# Altium PCB PCB1.PcbDoc
Units mm, origin at the board's own origin, x right, y up, seen from the top; angles counter-clockwise.
Board outline 99.69 x 92.71 mm, 4 copper layers (Component Side, Ground Plane, Power Plane, Solder Side), stack 0.844 mm thick; 51 components, 100 nets, 295 pads, 20 vias.
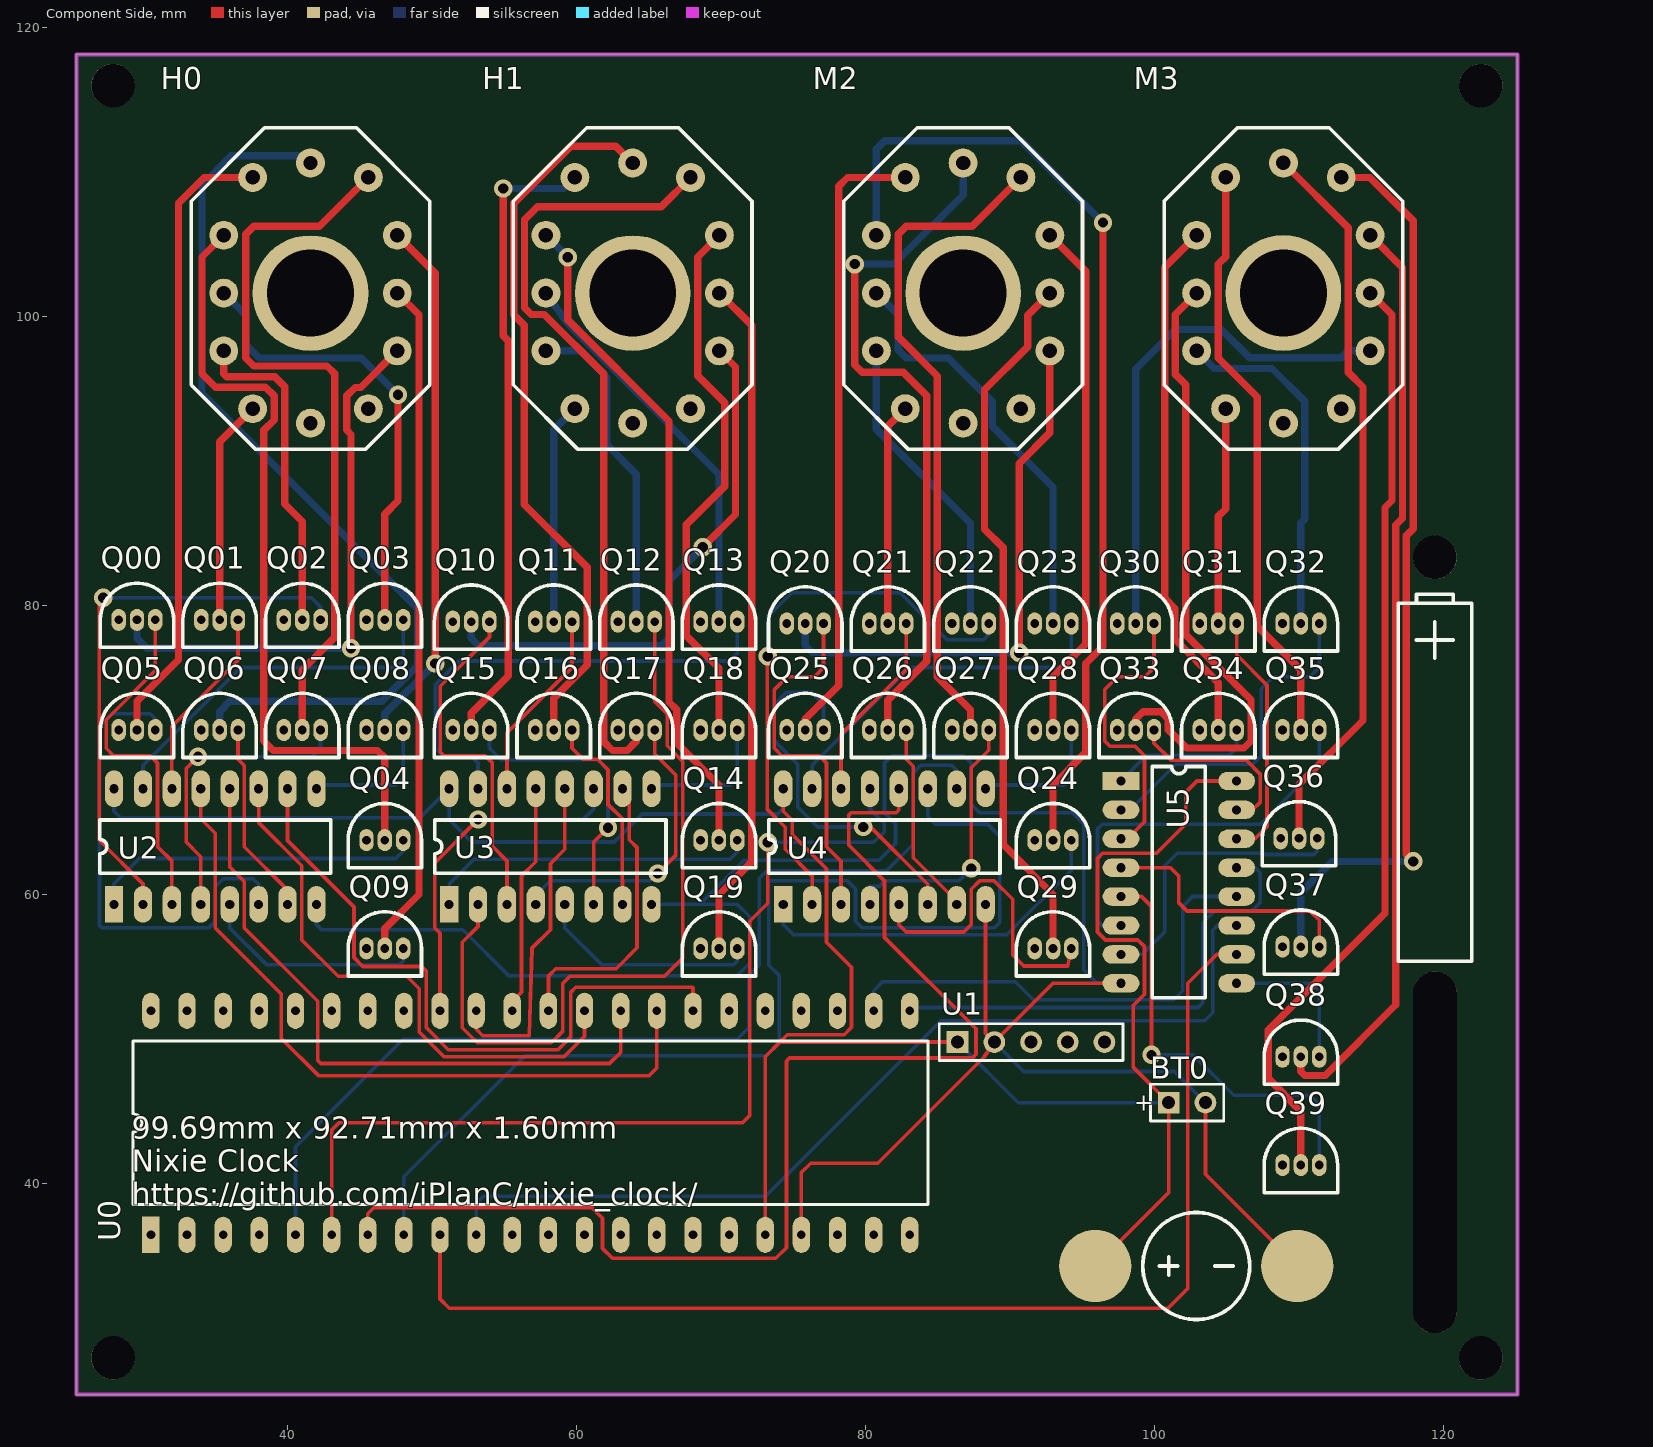
[diagram p0: Component Side view]
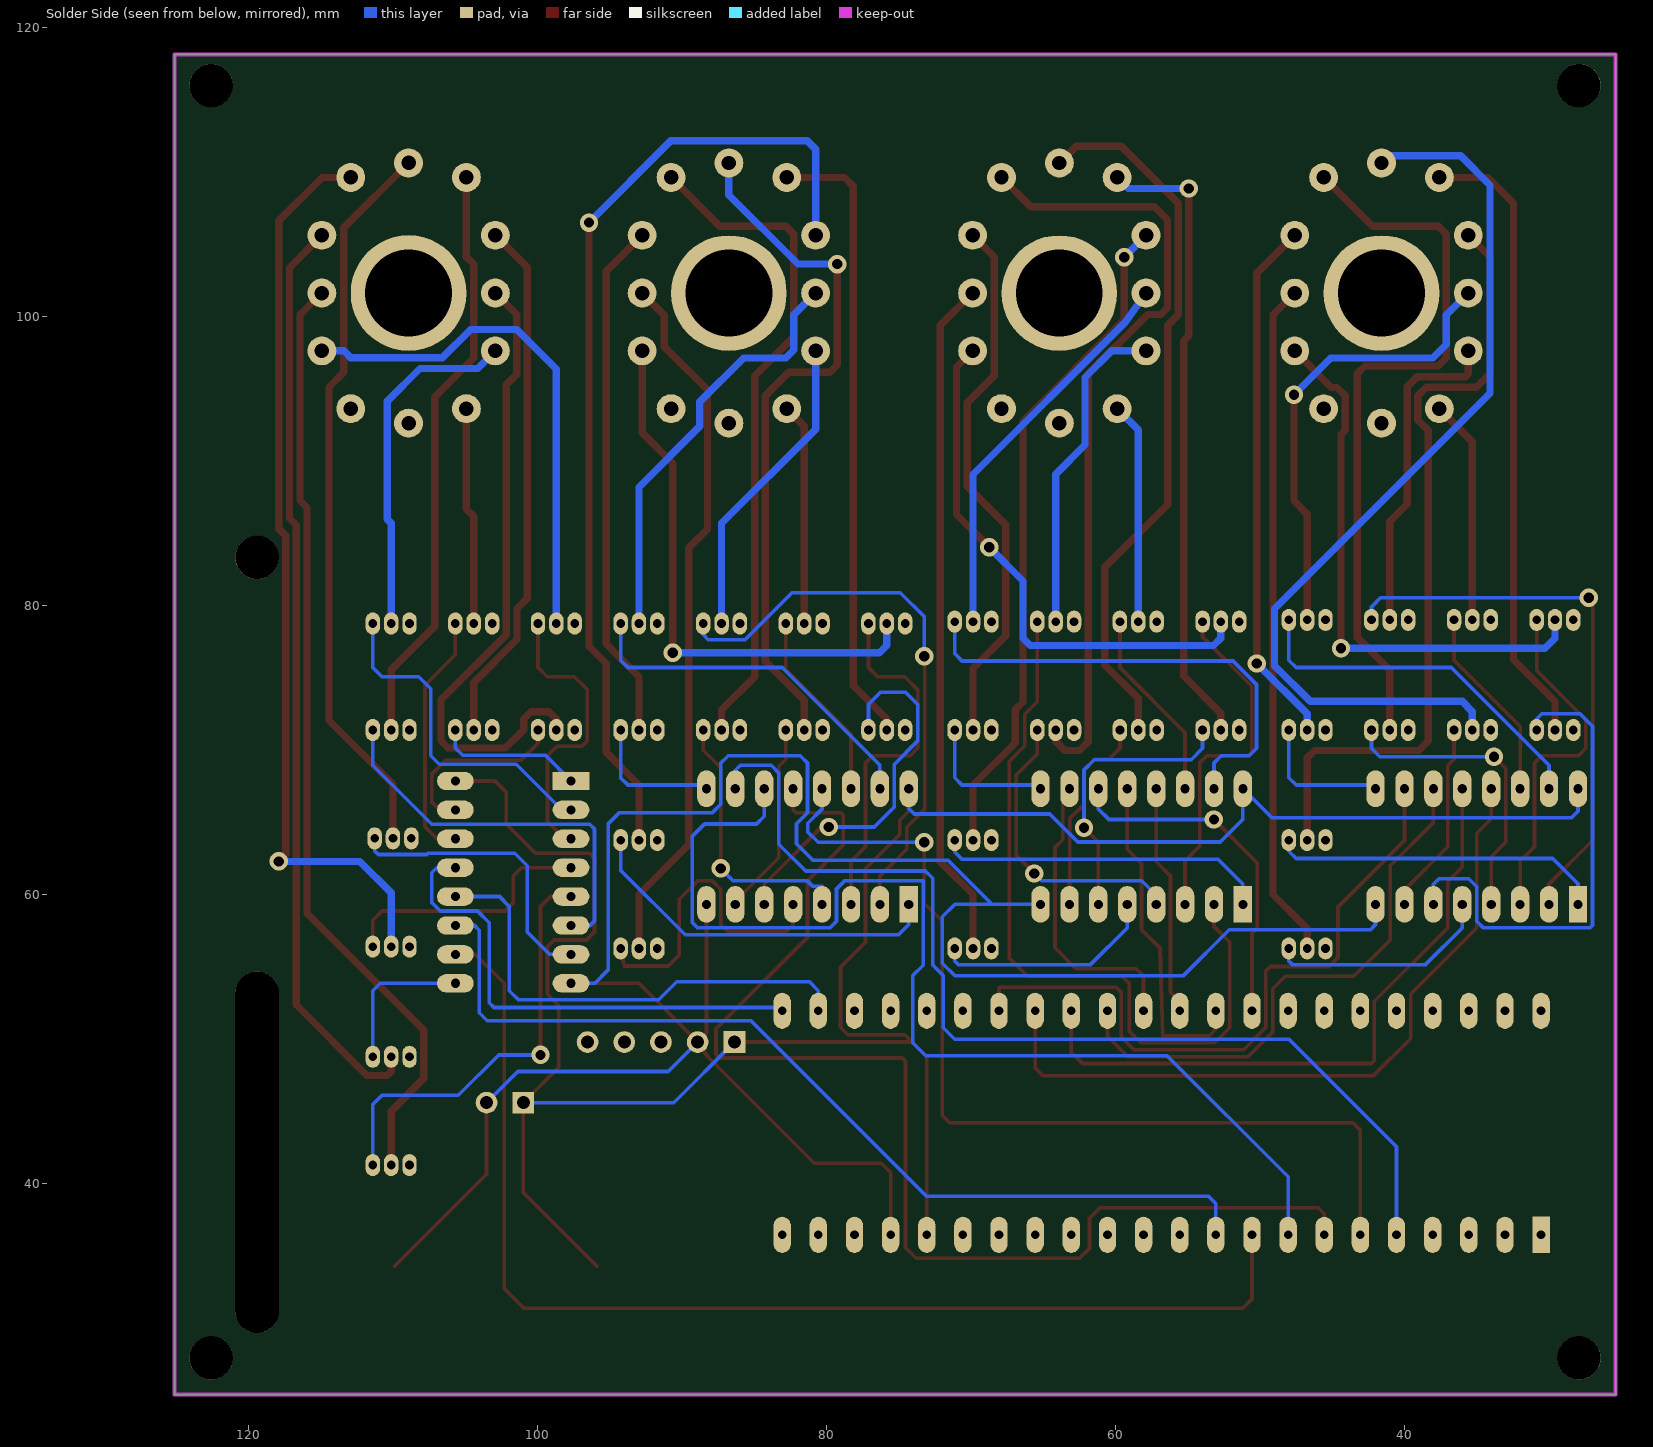
[diagram p1: Solder Side view, seen from below]
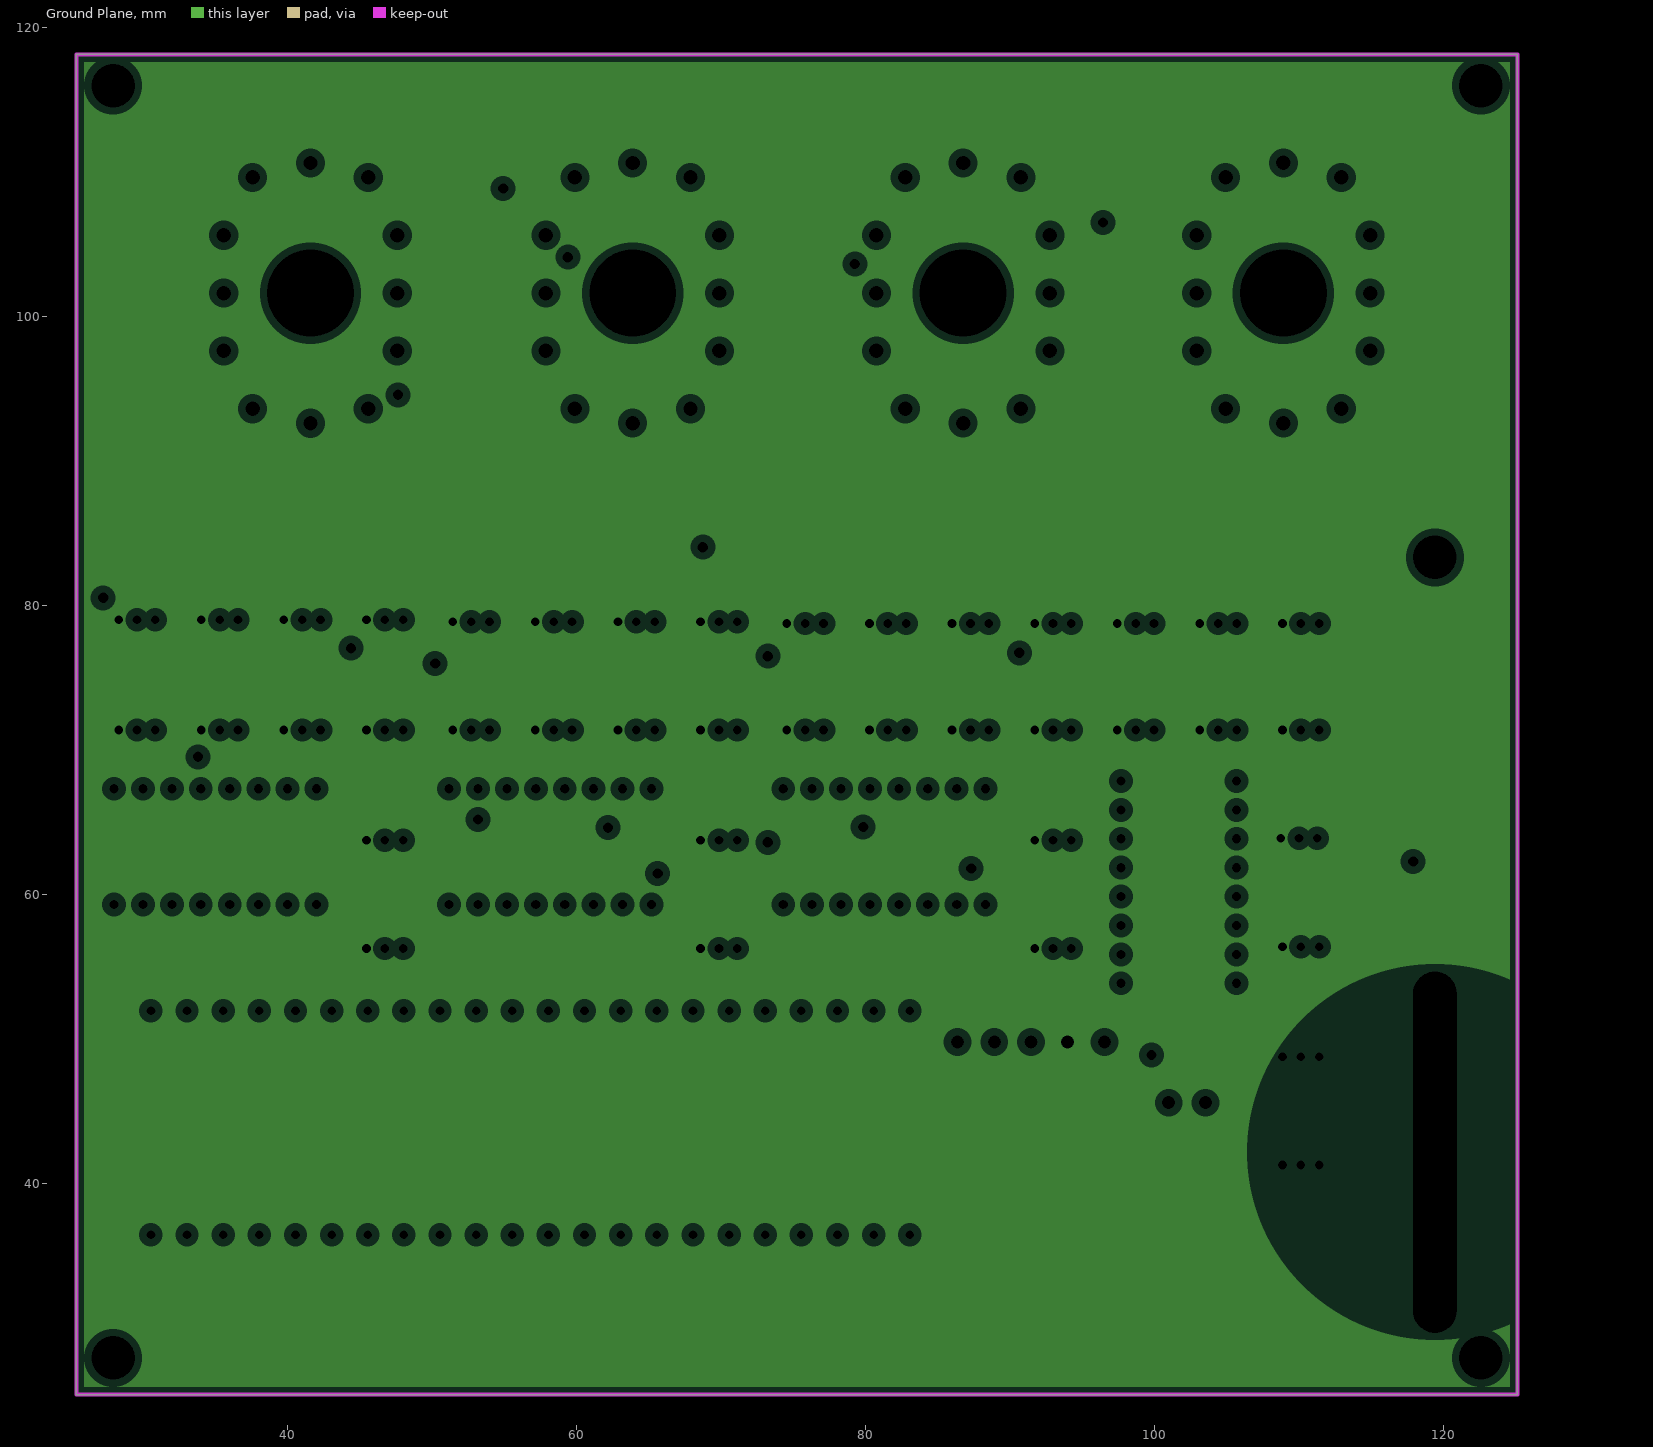
[diagram p2: Ground Plane, clearances drawn from the general rule]
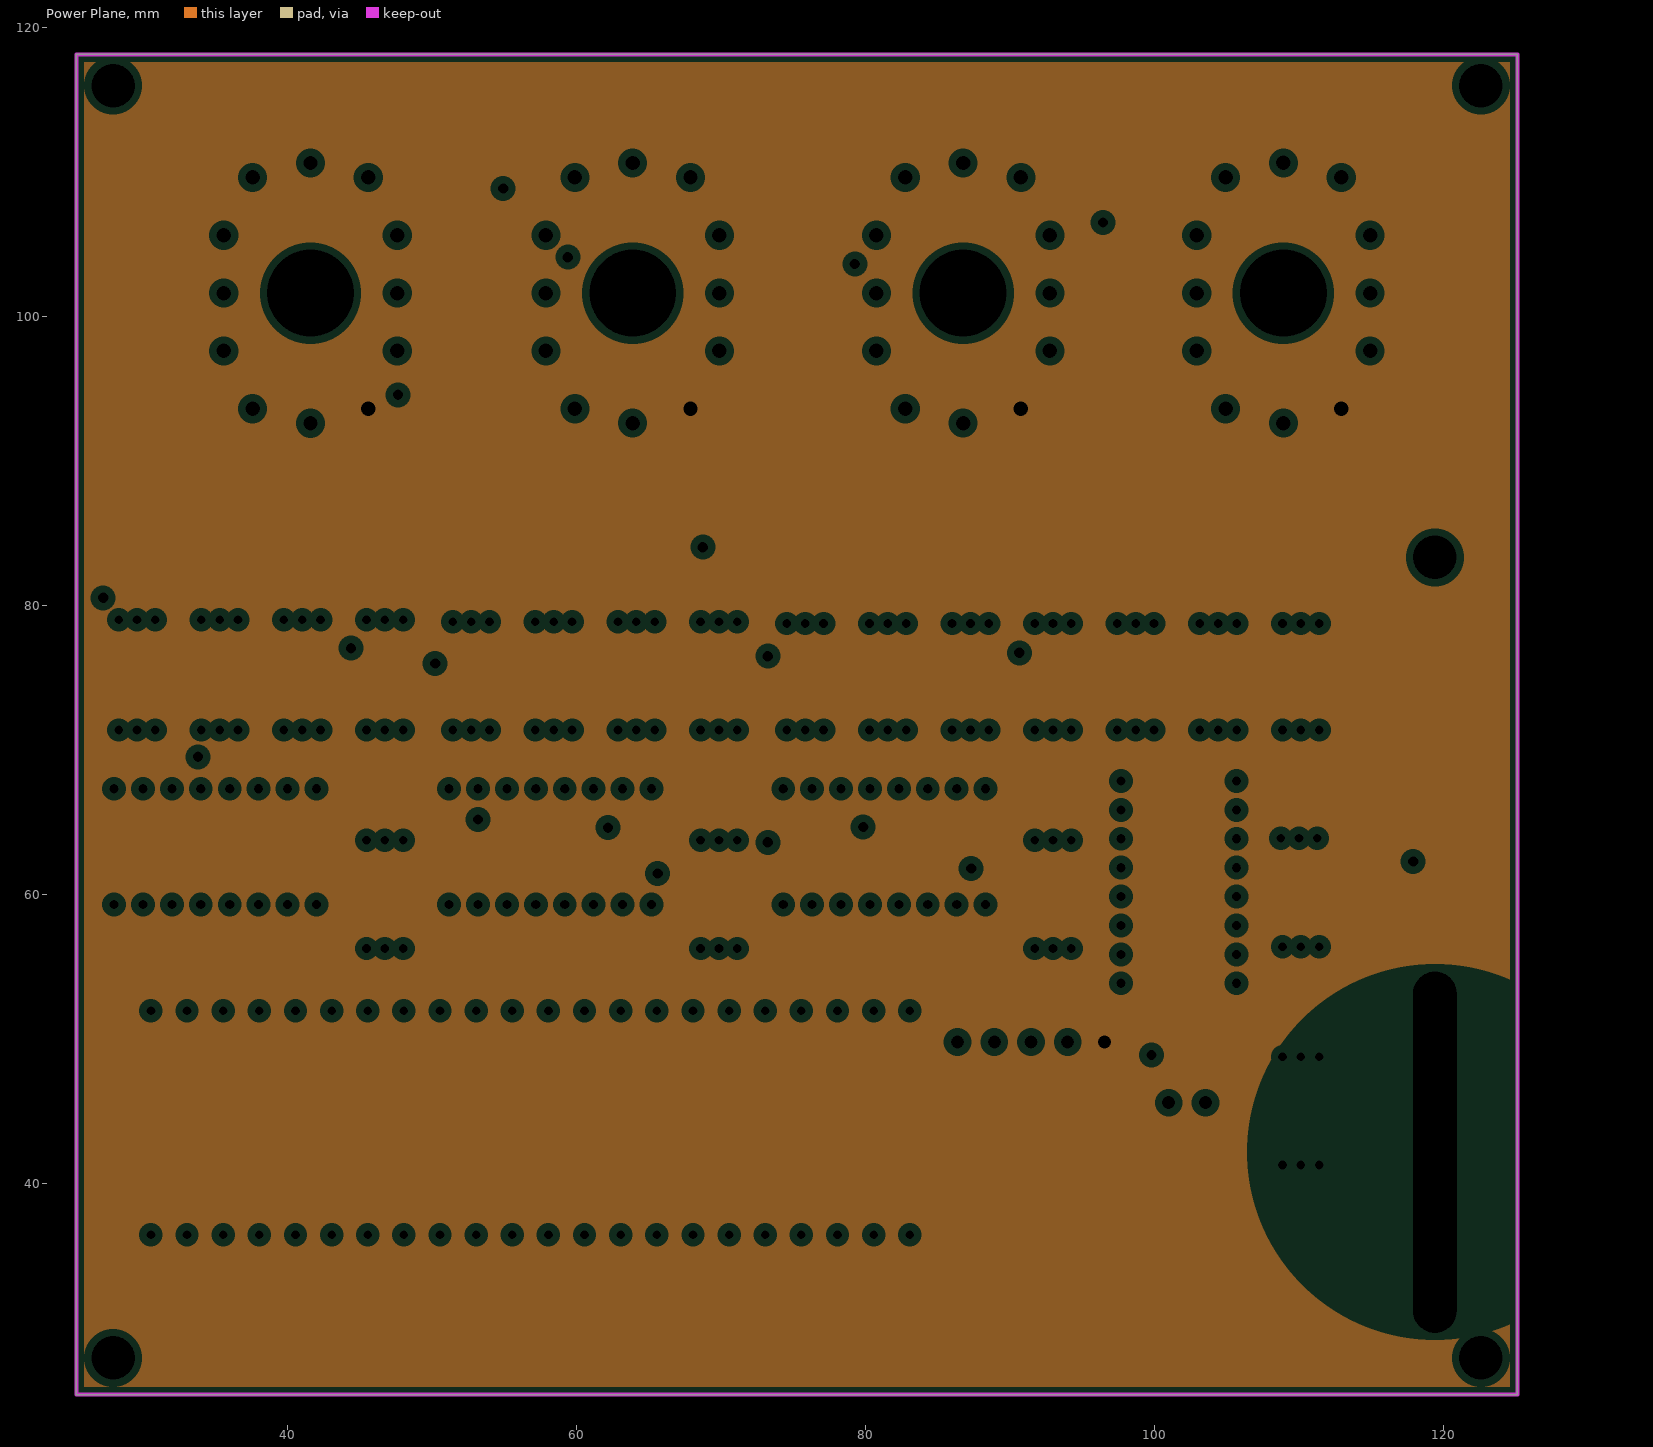
[diagram p3: Power Plane, clearances drawn from the general rule]

## Layer stack, top to bottom
Top Solder: solder mask 0.0102, Solder Resist, Dk 3.5
Component Side: signal copper 0.0356
Dielectric 1: core 0.32, FR-4, Dk 4.8
Ground Plane: plane copper 0.036, net 170VGND
Dielectric 3: prepreg 0.127, Dk 4.2
Power Plane: plane copper 0.036, net 170V
Dielectric 4: core 0.254, Dk 4.2
Solder Side: signal copper 0.0356
Bottom Solder: solder mask 0.0102, Solder Resist, Dk 3.5

## Board outline
25.4,25.4 125.095,25.4 125.095,118.11 25.4,118.11

## Design rules (kind name [scope] priority, off if disabled: settings)
Clearance [All] p1: gap=0.229
Height [All] p1: minheight=0 maxheight=152.4 prefheight=12.7
PlaneClearance [All] p1: clearance=0.508
PlaneConnect [All] p1: planeconnectstyle=Relief reliefexpansion=0.508 reliefentries=4 reliefconductorwidth=0.254 reliefairgap=0.254
PolygonConnect [All] p1: connectstyle=Relief reliefconductorwidth=0.254 reliefentries=4 polygonreliefangle="90 Angle" airgapwidth=0.254
RoutingVias [All] p1: holewidth=0.711 width=1.27 viastyle="Through Hole" minholewidth=0.711 minwidth=1.27 maxholewidth=0.711 maxwidth=1.27
SolderMaskExpansion [All] p1: expansion=0.102
Width "5v Width" [InNetClass('5v circuit')] p1: maxlimit=0.254 minlimit=0.254 preferedwidth=0.254
Width "170v Width" [InNetClass('170v circuit')] p2: maxlimit=0.508 minlimit=0.508 preferedwidth=0.508
27 further rules are at their usual default settings.

## Classes and differential pairs
net class "170v circuit": 170V 170VGND NH00 NH01 NH02 NH03 NH04 NH05 NH06 NH07 NH08 NH09 NH10 NH11 NH12 NH13 NH14 NH15 NH16 NH17 NH18 NH19 NM20 NM21 NM22 NM23 NM24 NM25 NM26 NM27 NM28 NM29 NM30 NM31 NM32 NM33 NM34 NM35 NM36 NM37 NM38 NM39
net class "5v circuit": 5V GND N00 N01 N02 N03 N04 N05 N06 N07 N08 N09 N10 N11 N12 N13 N14 N15 N16 N17 N18 N19 N20 N21 N22 N23 N24 N25 N26 N27 N28 N29 N30 N31 N32 N33 N34 N35 N36 N37 N38 N39 PA0 PA1 PA2 PA3 PA4 PA5 PA6 PA7 PA8 PA9 PA10 PA11 PA12 PA13 PA14 PA15
component class Sheet1: H0 H1 M2 M3 U0 U1 U2 U3 U4 U5

## Components (designator, comment, footprint, x,y, rotation, side; value= is the part's Value field where it differs from the comment)
BT0 "Battery" BAT-2 102.235,45.593 r0 top
H0 "IN-12B" "IN-12B BASE" 41.593,101.599 r0 top
H1 "IN-12B" "IN-12B BASE" 63.881,101.6 r0 top
M2 "IN-12B" "IN-12B BASE" 86.741,101.6 r0 top
M3 "IN-12B" "IN-12B BASE" 108.902,101.601 r0 top
Q00 "2N3904" TO-92 29.591,78.994 r0 top
Q01 "2N3904" TO-92 35.306,78.994 r0 top
Q02 "2N3904" TO-92 41.021,78.994 r0 top
Q03 "2N3904" TO-92 46.736,78.994 r0 top
Q04 "2N3904" TO-92 46.736,63.754 r0 top
Q05 "2N3904" TO-92 29.591,71.374 r0 top
Q06 "2N3904" TO-92 35.306,71.374 r0 top
Q07 "2N3904" TO-92 41.021,71.374 r0 top
Q08 "2N3904" TO-92 46.736,71.374 r0 top
Q09 "2N3904" TO-92 46.736,56.261 r0 top
Q10 "2N3904" TO-92 52.705,78.867 r0 top
Q11 "2N3904" TO-92 58.42,78.867 r0 top
Q12 "2N3904" TO-92 64.135,78.867 r0 top
Q13 "2N3904" TO-92 69.85,78.867 r0 top
Q14 "2N3904" TO-92 69.85,63.754 r0 top
Q15 "2N3904" TO-92 52.705,71.374 r0 top
Q16 "2N3904" TO-92 58.42,71.374 r0 top
Q17 "2N3904" TO-92 64.135,71.374 r0 top
Q18 "2N3904" TO-92 69.85,71.374 r0 top
Q19 "2N3904" TO-92 69.85,56.261 r0 top
Q20 "2N3904" TO-92 75.819,78.74 r0 top
Q21 "2N3904" TO-92 81.534,78.74 r0 top
Q22 "2N3904" TO-92 87.249,78.74 r0 top
Q23 "2N3904" TO-92 92.964,78.74 r0 top
Q24 "2N3904" TO-92 92.964,63.754 r0 top
Q25 "2N3904" TO-92 75.819,71.374 r0 top
Q26 "2N3904" TO-92 81.534,71.374 r0 top
Q27 "2N3904" TO-92 87.249,71.374 r0 top
Q28 "2N3904" TO-92 92.964,71.374 r0 top
Q29 "2N3904" TO-92 92.964,56.261 r0 top
Q30 "2N3904" TO-92 98.679,78.74 r0 top
Q31 "2N3904" TO-92 104.394,78.74 r0 top
Q32 "2N3904" TO-92 110.109,78.74 r0 top
Q33 "2N3904" TO-92 98.679,71.374 r0 top
Q34 "2N3904" TO-92 104.394,71.374 r0 top
Q35 "2N3904" TO-92 110.109,71.374 r0 top
Q36 "2N3904" TO-92 109.982,63.881 r0 top
Q37 "2N3904" TO-92 110.109,56.388 r0 top
Q38 "2N3904" TO-92 110.109,48.768 r0 top
Q39 "2N3904" TO-92 110.109,41.275 r0 top
U0 "STM32" STM32 30.553,36.449 r90 top
U1 "boost" HDR1X5 86.36,49.784 r0 top
U2 "CD4028" CD4028 28.004,59.309 r90 top
U3 "CD4028" CD4028 51.182,59.31 r90 top
U4 "CD4028" CD4028 74.296,59.309 r90 top
U5 "CD4028" CD4028 97.663,67.849 r0 top

## Footprints (in the part's own frame and the unit in brackets; to place one, negate y for a bottom-side part, rotate by r counter-clockwise, add the part's x,y. Pads: shape width x height; smd on the part's side, far side on the other; paste and mask are expansions set on the pad)
BAT-2 [mm] "Battery; 2 Leads"
  rect 1.5x1.5 hole 0.9: 1(-1.27,0)
  round 1.5 hole 0.9: 2(1.27,0)
  silkscreen extent -2.54,-1.27 2.54,1.27
CD4028 [mm]
  rect 2.54x1.27 hole 0.635: 1(0,0)
  oval 2.54x1.27 hole 0.635: 2(0,-2) 3(0,-4) 4(0,-6) 5(0,-8) 6(0,-10) 7(0,-12) 8(0,-14) 9(8,-14) 10(8,-12) 11(8,-10) 12(8,-8) 13(8,-6) 14(8,-4) 15(8,-2) 16(8,0)
  silkscreen extent 2.16,-15 5.84,1
HDR1X5 [mm] "Connector; Header; 5 Position"
  rect 1.5x1.5 hole 0.9: 1(0,0)
  round 1.5 hole 0.9: 2(2.54,0) 3(5.08,0) 4(7.62,0) 5(10.16,0)
  silkscreen extent -1.27,-1.27 11.43,1.27
"IN-12B BASE" [mm]
  round 8 hole 6: 0(0,0)
  round 2 hole 1: 1(-4,-8) 2(-6,-4) 3(-6,0) 4(-6,4) 5(-4,8) 6(0,9) 7(4,8) 8(6,4) 9(6,0) 10(6,-4) 11(4,-8) 12(0,-9)
  silkscreen extent -8.25,-10.8 8.26,11.43, body extent -10.5,-15.13 10.5,15.88, height 29
STM32 [mm]
  rect 2.5x1.2 hole 0.6: 1(0,0)
  oval 2.5x1.2 hole 0.6: 2(0,-2.5) 3(0,-5) 4(0,-7.5) 5(0,-10) 6(0,-12.5) 7(0,-15) 8(0,-17.5) 9(0,-20) 10(0,-22.5) 11(0,-25) 12(0,-27.5) 13(0,-30) 14(0,-32.5) 15(0,-35) 16(0,-37.5) 17(0,-40) 18(0,-42.5) 19(0,-45) 20(0,-47.5) 21(0,-50) 22(0,-52.5) 23(15.5,-52.5) 24(15.5,-50) 25(15.5,-47.5) 26(15.5,-45) 27(15.5,-42.5) 28(15.5,-40) 29(15.5,-37.5) 30(15.5,-35) 31(15.5,-32.5) 32(15.5,-30) 33(15.5,-27.5) 34(15.5,-25) 35(15.5,-22.5) 36(15.5,-20) 37(15.5,-17.5) 38(15.5,-15) 39(15.5,-12.5) 40(15.5,-10) 41(15.5,-7.5) 42(15.5,-5) 43(15.5,-2.5) 44(15.5,0)
  silkscreen extent 2.08,-53.75 13.42,1.25
TO-92 [mm] "NPN"
  oval 1x1.524 hole 0.6: 1(-1.27,0) 2(1.27,0) 3(0,0)
  silkscreen extent -2.54,-1.91 2.54,2.54

## Part data
BT0: "Multicell Battery"
Q00 Q01 Q02 Q03 Q04 Q05 Q06 Q07 Q08 Q09 Q10 Q11 Q12 Q13 Q14 Q15 Q16 Q17 Q18 Q19 Q20 Q21 Q22 Q23 Q24 Q25 Q26 Q27 Q28 Q29 Q30 Q31 Q32 Q33 Q34 Q35 Q36 Q37 Q38 Q39: "NPN General Purpose Amplifier"

## Free pads (board coordinates)
  round 3 hole 3: 0(27.94,115.951) 1(122.555,115.951) 2(27.94,27.94) 3(122.555,27.94) 4(119.38,83.312)
  oval 3x25 hole 3 slot 25 at 90 deg: 5(119.38,42.164)
  round 5 smd: 6(95.885,34.29) 7(109.855,34.29)

## Via types
v1: diameter 1.27, hole 0.711, Component Side to Solder Side, 20 vias

## Nets (pads, with @x,y where several pads share a name; then routed paths per layer and width w, separated by ;. In a path a pad name is that pad's centre, name@x,y a point inside that pad or via, vN(x,y) a via of type N, cw(c..) or ccw(c..) an arc to the next point about the centre after c; other vN are vias at no path point)
5V: BT0.1 pad.6 U0.18 U1.1 U2.16 U3.16 U4.16 U5.16 | length 167.6
  Component Side w0.254: U0.18 73.053,48.768 74.069,49.784 ; U4.16 74.296,65.747 74.918,65.126 74.918,64.147 77.292,61.773 77.292,56.693 79.019,54.966 79.019,50.8 78.511,50.292 74.577,50.292 74.069,49.784 ; U1.1 74.069,49.784 ; pad.6 100.965,39.37 BT0.1 98.501,48.057 98.501,52.299 99.289,53.086 99.289,56.388 98.831,56.845 96.596,56.845 96.037,57.404 96.037,62.484 96.393,62.84 100.127,62.84 102.133,64.846 102.133,67.056 102.926,67.849 U5.16
  Solder Side w0.254: U2.16 28.004,65.747 28.448,65.303 49.175,65.303 U3.16 51.182,65.201 52.756,63.627 62.614,63.627 64.544,65.557 73.914,65.557 74.296,65.939 U4.16 ; U1.1 90.551,45.593 BT0.1
170V: H0.11 H1.11 M2.11 M3.11 U1.5
170VGND: Q00.1 Q01.1 Q02.1 Q03.1 Q04.1 Q05.1 Q06.1 Q07.1 Q08.1 Q09.1 Q10.1 Q11.1 Q12.1 Q13.1 Q14.1 Q15.1 Q16.1 Q17.1 Q18.1 Q19.1 Q20.1 Q21.1 Q22.1 Q23.1 Q24.1 Q25.1 Q26.1 Q27.1 Q28.1 Q29.1 Q30.1 Q31.1 Q32.1 Q33.1 Q34.1 Q35.1 Q36.1 Q37.1 Q38.1 Q39.1 U1.4
GND: BT0.2 pad.7 U0.19 U1.2 U2.8 U3.8 U4.8 U5.8 | length 167.4
  Component Side w0.254: U0.19 75.553,40.756 76.2,41.403 80.836,41.403 88.201,48.768 U1.2 ; U4.8 88.296,50.388 U1.2 ; U5.8 92.965,53.849 U1.2 ; BT0.2 103.505,40.64 pad.7
  Solder Side w0.254: U2.8 42.004,57.912 42.36,57.556 52.121,57.556 55.296,54.381 71.12,54.381 71.984,55.245 71.984,58.445 71.12,59.309 68.529,59.309 ; U3.8 68.529,59.309 ; U1.2 90.932,47.752 101.346,47.752 BT0.2 ; U5.8 96.012,53.849 95.098,54.763 95.098,64.872 94.31,65.659 87.884,65.659 87.3,66.243 87.3,69.088 86.792,69.596 81.813,69.596 81.305,69.088 81.305,65.652 82.067,64.89 82.067,63.5 80.931,62.364 71.584,62.364 68.529,59.309
N00: Q00.2 U2.3 | length 24.5
  Component Side w0.254: Q00.2 30.861,75.489 27.457,72.085 27.457,70.104 27.965,69.596 30.505,69.596 31.013,69.088 31.013,63.297 32.004,62.306 U2.3
N01: Q01.2 U2.14 | length 13.6
  Component Side w0.254: U2.14 32.004,71.628 36.576,76.2 Q01.2
N02: Q02.2 U2.2 | length 38.8
  Component Side w0.254: v1(27.254,80.518) 26.975,80.239 26.975,63.754 30.004,60.725 U2.2
  Solder Side w0.254: v1(27.254,80.518) 41.656,80.518 42.291,79.883 Q02.2
N03: Q03.2 U2.15 | length 25.4
  Solder Side w0.254: U2.15 30.004,68.936 36.76,75.692 47.498,75.692 48.006,76.2 Q03.2
N04: Q04.2 U2.1 | length 23.1
  Solder Side w0.254: U2.1 28.004,60.745 29.743,62.484 47.498,62.484 48.006,62.992 Q04.2
N05: Q05.2 U2.6 | length 34.3
  Solder Side w0.254: Q05.2 30.861,72.136 30.505,72.492 27.864,72.492 27,71.628 27,57.861 27.178,57.683 34.544,57.683 35.001,58.141 35.001,60.528 35.56,61.087 37.623,61.087 38.004,60.706 U2.6
N06: Q06.2 U2.7 | length 13.5
  Component Side w0.254: Q06.2 36.576,69.342 37.008,68.91 37.008,63.297 40.004,60.301 U2.7
N07: Q07.2 U2.4 | length 21
  Component Side w0.254: v1(33.807,69.52) 32.995,68.707 32.995,63.62 34.004,62.611 U2.4
  Solder Side w0.254: v1(33.807,69.52) 41.707,69.52 42.291,70.104 Q07.2
N08: Q08.2 U2.9 | length 9.8
  Solder Side w0.254: U2.9 42.004,67.564 47.498,67.564 48.006,68.072 Q08.2
N09: Q09.2 U2.5 | length 15.6
  Solder Side w0.254: U2.5 36.004,57.683 38.544,55.143 47.752,55.143 48.006,55.397 Q09.2
N10: Q10.2 U3.3 | length 24.5
  Component Side w0.254: Q10.2 53.975,77.8 50.571,74.397 50.571,69.85 50.825,69.596 53.67,69.596 54.178,69.088 54.178,63.322 55.182,62.318 U3.3
N11: Q11.2 U3.14 | length 13.4
  Component Side w0.254: U3.14 55.182,71.184 59.69,75.692 Q11.2
N12: Q12.2 U3.2 | length 53.1
  Component Side w0.254: U3.2 53.182,57.779 52.095,56.693 52.095,50.775 53.127,49.743 58.252,49.743 59.055,50.546 59.055,53.848 59.538,54.331 66.091,54.331 67.335,55.575 67.335,69.216 66.269,70.283 66.269,72.466 65.405,73.33 Q12.2
N13: Q13.2 U3.15 | length 33.5
  Solder Side w0.254: U3.15 53.182,69.088 52.674,69.596 50.749,69.596 50.241,70.104 50.241,74.524 51.867,76.149 70.612,76.149 71.12,76.657 Q13.2
N14: Q14.2 U3.1 | length 23.1
  Solder Side w0.254: U3.1 51.182,60.706 52.909,62.433 70.612,62.433 71.12,62.941 Q14.2
N15: Q15.2 U3.6 | length 19.8
  Component Side w0.254: U3.6 61.182,63.62 v1(62.179,64.618)
  Solder Side w0.254: Q15.2 53.975,70.104 54.762,69.317 61.468,69.317 62.179,68.605 v1(62.179,64.618)
N16: Q16.2 U3.7 | length 14.1
  Component Side w0.254: Q16.2 59.69,70.104 60.452,69.342 61.468,69.342 62.179,68.631 62.179,66.218 63.17,65.227 63.17,60.998 63.182,60.985 U3.7
N17: Q17.2 U3.4 | length 20.7
  Component Side w0.254: Q17.2 65.405,69.72 66.853,68.272 66.853,62.688 v1(65.607,61.443)
  Solder Side w0.254: U3.4 57.182,59.944 58.174,60.936 65.1,60.936 v1(65.607,61.443)
N18: Q18.2 U3.9 | length 9.7
  Solder Side w0.254: U3.9 65.182,67.564 70.612,67.564 71.12,68.072 Q18.2
N19: Q19.2 U3.5 | length 15.6
  Solder Side w0.254: U3.5 59.182,57.683 61.722,55.143 70.866,55.143 71.12,55.397 Q19.2
N20: Q20.2 U4.3 | length 25.4
  Component Side w0.254: Q20.2 77.089,75.692 76.454,75.057 74.574,75.057 73.685,74.168 73.685,70.104 74.193,69.596 76.784,69.596 77.292,69.088 77.292,63.297 78.296,62.293 U4.3
N21: Q21.2 U4.14 | length 13.3
  Component Side w0.254: U4.14 78.296,71.057 82.804,75.565 Q21.2
N22: Q22.2 U4.2 | length 39.4
  Component Side w0.254: v1(73.228,76.479) 73.203,76.454 73.203,65.875 74.435,64.643 74.435,63.131 76.296,61.27 U4.2
  Solder Side w0.254: v1(73.228,76.479) 73.228,79.223 74.879,80.874 82.372,80.874 85.623,77.622 88.163,77.622 88.519,77.978 Q22.2
N23: Q23.2 U4.15 | length 25.1
  Solder Side w0.254: U4.15 76.296,68.936 83.052,75.692 93.726,75.692 94.234,76.2 Q23.2
N24: Q24.2 U4.1 | length 25.6
  Solder Side w0.254: U4.1 74.296,57.912 75.007,57.201 89.769,57.201 94.234,61.666 Q24.2
N25: Q25.2 U4.6 | length 26.3
  Component Side w0.254: v1(79.832,64.662) 80.34,64.662 84.296,60.706 U4.6
  Solder Side w0.254: Q25.2 77.089,73.152 76.251,73.99 74.524,73.99 73.685,73.152 73.685,70.612 75.305,68.992 75.305,66.04 76.684,64.662 v1(79.832,64.662)
N26: Q26.2 U4.7 | length 13.5
  Component Side w0.254: Q26.2 82.804,69.342 83.287,68.859 83.287,62.542 86.296,59.533 U4.7
N27: Q27.2 U4.4 | length 18.8
  Component Side w0.254: v1(87.3,61.798) 87.3,68.758 88.519,69.977 Q27.2
  Solder Side w0.254: U4.4 80.296,60.554 80.924,60.554 81.305,60.935 86.436,60.935 v1(87.3,61.798)
N28: Q28.2 U4.9 | length 9.7
  Solder Side w0.254: U4.9 88.296,67.564 93.726,67.564 94.234,68.072 Q28.2
N29: Q29.2 U4.5 | length 22.1
  Component Side w0.254: U4.5 82.296,57.912 82.804,57.404 86.792,57.404 87.3,57.912 87.3,60.35 87.884,60.935 88.9,60.935 90.17,59.665 90.17,55.804 90.932,55.042 93.98,55.042 Q29.2
N30: Q30.2 U5.3 | length 20.5
  Component Side w0.254: U5.3 98.114,63.849 99.289,65.024 99.289,69.596 98.628,70.256 96.901,70.256 96.545,70.612 96.545,74.168 97.434,75.057 99.314,75.057 99.949,75.692 Q30.2
N31: Q31.2 U5.14 | length 17.4
  Component Side w0.254: U5.14 106.934,63.849 107.771,64.686 107.771,74.474 105.664,76.581 Q31.2
N32: Q32.2 U5.2 | length 23.5
  Solder Side w0.254: U5.2 98.298,65.849 101.461,69.012 106.782,69.012 107.366,69.596 107.366,74.219 108.204,75.057 110.744,75.057 111.379,75.692 Q32.2
N33: Q33.2 U5.15 | length 12.9
  Component Side w0.254: Q33.2 99.949,70.46 101.117,69.291 106.324,69.291 107.289,68.327 107.289,66.356 106.782,65.849 U5.15
N34: Q34.2 U5.1 | length 10.2
  Solder Side w0.254: U5.1 99.435,69.621 105.156,69.621 105.664,70.129 Q34.2
N35: Q35.2 U5.6 | length 27.7
  Solder Side w0.254: U5.6 96.354,57.849 96.037,58.166 96.037,64.516 96.368,64.846 107.29,64.846 111.379,68.936 Q35.2
N36: Q36.2 U5.7 | length 20.2
  Solder Side w0.254: U5.7 99.131,55.849 100.686,57.404 100.686,61.976 101.549,62.84 107.569,62.84 107.645,62.763 110.998,62.763 111.252,63.017 Q36.2
N37: Q37.2 U5.4 | length 18.1
  Component Side w0.254: U5.4 101.092,61.849 101.651,61.29 101.651,59.436 102.235,58.852 110.744,58.852 111.379,58.217 Q37.2
N38: Q38.2 U5.9 | length 10.5
  Solder Side w0.254: U5.9 110.87,53.849 111.379,53.34 Q38.2
N39: Q39.2 U5.5 | length 29.9
  Component Side w0.254: U5.5 99.079,59.849 99.771,59.157 v1(99.771,48.895)
  Solder Side w0.254: v1(99.771,48.895) 102.667,48.895 105.461,46.101 110.744,46.101 111.379,45.466 Q39.2
NH00: H0.10 Q00.3 | length 38.7
  Component Side w0.508: v1(44.399,77.038) 44.399,91.821 44.094,92.126 44.094,94.488 44.679,95.072 45.066,95.072 H0.10
  Solder Side w0.508: Q00.3 29.591,77.724 30.277,77.038 v1(44.399,77.038)
NH01: H0.1 Q01.3 | length 15.6
  Component Side w0.508: Q01.3 35.306,91.312 H0.1
NH02: H0.2 Q02.3 | length 22.8
  Component Side w0.508: H0.2 35.593,96.012 35.787,95.818 39.116,95.818 39.812,95.122 39.812,87.01 41.021,85.801 Q02.3
NH03: H0.3 Q03.3 | length 32.1
  Component Side w0.508: Q03.3 46.736,86.309 47.65,87.224 v1(47.65,94.564)
  Solder Side w0.508: H0.3 37.109,100.083 37.109,98.044 38.049,97.104 45.11,97.104 v1(47.65,94.564)
NH04: H0.4 Q04.3 | length 54.6
  Component Side w0.508: H0.4 34.087,104.093 34.087,96.012 35.017,95.082 38.482,95.082 39.076,94.488 39.076,92.822 38.354,92.1 38.354,70.612 39.014,69.952 46.228,69.952 46.736,69.444 Q04.3
NH05: H0.5 Q05.3 | length 43.5
  Component Side w0.508: Q05.3 29.591,73.355 32.461,76.225 32.461,107.823 34.237,109.599 H0.5
NH06: H0.6 Q06.3 | length 64.3
  Solder Side w0.508: Q06.3 35.306,72.644 36.017,73.355 46.533,73.355 48.997,75.819 48.997,79.756 34.087,94.666 34.087,109.068 36.119,111.1 41.092,111.1 H0.6
NH07: H0.7 Q07.3 | length 50.9
  Component Side w0.508: Q07.3 41.021,75.526 43.282,77.786 43.282,96.012 42.739,96.555 37.659,96.555 37.109,97.104 37.109,105.664 37.668,106.223 42.217,106.223 H0.7
NH08: H0.8 Q08.3 | length 36.8
  Component Side w0.508: H0.8 50.216,102.976 v1(50.216,75.971)
  Solder Side w0.508: Q08.3 46.736,72.492 v1(50.216,75.971)
NH09: H0.9 Q09.3 | length 46.9
  Component Side w0.508: Q09.3 46.736,57.633 49.098,59.995 49.098,100.094 H0.9
NH10: H1.10 Q10.3 | length 37.5
  Component Side w0.508: v1(68.732,84.023) 70.993,86.284 70.993,96.488 H1.10
  Solder Side w0.508: Q10.3 52.705,77.724 53.213,77.216 65.888,77.216 66.396,77.724 66.396,81.686 v1(68.732,84.023)
NH11: H1.1 Q11.3 | length 15.3
  Solder Side w0.508: Q11.3 58.42,92.139 H1.1
NH12: H1.2 Q12.3 | length 22.7
  Solder Side w0.508: H1.2 60.261,97.6 62.103,95.758 62.103,91.11 64.135,89.078 Q12.3
NH13: H1.3 Q13.3 | length 27.6
  Solder Side w0.508: H1.3 59.385,99.517 69.85,89.052 Q13.3
NH14: H1.4 Q14.3 | length 46.8
  Component Side w0.508: v1(59.398,104.083) 59.398,99.743 66.396,92.746 66.396,73.308 66.94,72.764 66.94,70.474 69.85,67.564 Q14.3
  Solder Side w0.508: H1.4 v1(59.398,104.083)
NH15: H1.5 Q15.3 | length 43.9
  Component Side w0.508: Q15.3 52.705,72.542 55.27,75.108 55.27,98.299 54.925,98.644 v1(54.925,108.839)
  Solder Side w0.508: v1(54.925,108.839) 59.12,108.839 H1.5
NH16: H1.6 Q16.3 | length 49.8
  Component Side w0.508: Q16.3 58.42,73.558 60.731,75.87 60.731,82.626 56.388,86.97 56.388,99.381 55.662,100.107 55.662,107.819 59.603,111.76 62.721,111.76 H1.6
NH17: H1.7 Q17.3 | length 55.2
  Component Side w0.508: Q17.3 64.135,70.587 63.5,69.952 62.484,69.952 61.874,70.561 61.874,96.009 57.766,100.117 56.865,100.117 56.398,100.584 56.398,106.68 57.3,107.581 65.862,107.581 H1.7
NH18: H1.8 Q18.3 | length 37.7
  Component Side w0.508: Q18.3 69.85,75.641 67.589,77.902 67.589,85.573 70.256,88.24 70.256,94.005 68.377,95.885 68.377,104.096 H1.8
NH19: H1.9 Q19.3 | length 47.2
  Component Side w0.508: Q19.3 69.85,59.995 72.111,62.255 72.111,99.37 H1.9
NM20: M2.10 Q20.3 | length 38.3
  Component Side w0.508: v1(90.627,76.708) 90.627,89.814 92.741,91.928 M2.10
  Solder Side w0.508: Q20.3 75.819,77.216 76.327,76.708 v1(90.627,76.708)
NM21: M2.1 Q21.3 | length 15.4
  Component Side w0.508: Q21.3 81.534,92.393 M2.1
NM22: M2.2 Q22.3 | length 21.6
  Solder Side w0.508: M2.2 80.741,92.182 87.249,85.674 Q22.3
NM23: M2.3 Q23.3 | length 29.6
  Solder Side w0.508: M2.3 82.245,100.096 82.245,97.663 82.804,97.104 85.725,97.104 88.748,94.082 88.748,92.38 92.964,88.163 Q23.3
NM24: M2.4 Q24.3 | length 68.4
  Component Side w0.508: Q24.3 92.964,67.564 95.225,69.825 95.225,75.971 96.418,77.165 v1(96.418,106.477)
  Solder Side w0.508: M2.4 80.741,111.557 81.325,112.141 90.754,112.141 v1(96.418,106.477)
NM25: M2.5 Q25.3 | length 43.4
  Component Side w0.508: Q25.3 75.819,72.136 78.13,74.447 78.13,108.99 78.74,109.6 M2.5
NM26: M2.6 Q26.3 | length 48.8
  Component Side w0.508: v1(79.248,103.607) 79.248,96.622 79.756,96.114 82.598,96.114 84.224,94.488 84.224,76.121 81.534,73.431 Q26.3
  Solder Side w0.508: v1(79.248,103.607) 81.966,103.607 86.741,108.382 M2.6
NM27: M2.7 Q27.3 | length 46.5
  Component Side w0.508: Q27.3 87.249,72.768 84.96,75.057 84.96,95.863 82.245,98.578 82.245,105.664 82.804,106.223 87.364,106.223 M2.7
NM28: M2.8 Q28.3 | length 36.2
  Component Side w0.508: M2.8 95.225,103.116 95.225,77.318 92.964,75.057 Q28.3
NM29: M2.9 Q29.3 | length 49.2
  Component Side w0.508: M2.9 91.211,100.07 91.211,97.892 88.224,94.904 88.224,85.258 89.51,83.972 89.51,63.449 92.964,59.995 Q29.3
NM30: M3.10 Q30.3 | length 36
  Solder Side w0.508: Q30.3 98.679,96.342 101.422,99.085 104.597,99.085 106.564,97.118 112.892,97.118 113.374,97.601 M3.10
NM31: M3.1 Q31.3 | length 15.1
  Component Side w0.508: Q31.3 104.394,86.157 104.902,86.665 M3.1
NM32: M3.2 Q32.3 | length 24.4
  Solder Side w0.508: M3.2 104.121,96.382 108.114,96.382 110.388,94.107 110.388,85.954 110.109,85.674 Q32.3
NM33: M3.3 Q33.3 | length 44.4
  Component Side w0.508: Q33.3 98.679,72.136 99.187,72.644 100.432,72.644 100.94,72.136 100.94,71.399 102.21,70.129 106.172,70.129 106.655,70.612 106.655,73.457 102.141,77.97 102.141,95.265 101.419,95.987 101.419,100.118 M3.3
NM34: M3.4 Q34.3 | length 36.7
  Component Side w0.508: M3.4 100.683,103.382 100.683,80.495 101.405,79.773 101.405,77.64 104.394,74.651 Q34.3
NM35: M3.5 Q35.3 | length 40.8
  Component Side w0.508: M3.5 104.902,104.115 104.394,103.607 104.394,97.104 107.086,94.412 107.086,78.562 110.109,75.54 Q35.3
NM36: M3.6 Q36.3 | length 50.8
  Component Side w0.508: M3.6 113.386,106.117 113.386,96.114 114.402,95.098 114.402,72.034 109.982,67.615 Q36.3
NM37: M3.7 Q37.3 | length 63.3
  Component Side w0.508: M3.7 114.884,109.601 117.881,106.604 117.881,85.293 117.397,84.809 117.397,62.765 v1(117.881,62.281)
  Solder Side w0.508: Q37.3 110.109,60.122 112.268,62.281 v1(117.881,62.281)
NM38: M3.8 Q38.3 | length 64.1
  Component Side w0.508: Q38.3 110.109,47.752 110.388,47.473 111.785,47.473 116.661,52.348 116.661,85.547 117.145,86.031 117.145,103.358 M3.8
NM39: M3.9 Q39.3 | length 65.4
  Component Side w0.508: Q39.3 110.109,45.009 107.848,47.269 107.848,50.622 115.924,58.698 115.924,86.768 116.408,87.252 116.408,100.095 M3.9
PA0: U0.29 U2.10 | length 47.2
  Component Side w0.254: U2.10 40.004,63.729 44.602,59.13 44.602,55.626 45.212,55.016 49.276,55.016 49.597,54.695 49.597,50.783 51.12,49.26 58.709,49.26 59.588,50.14 59.588,53.213 59.944,53.569 68.028,53.569 68.053,53.543 U0.29
PA1: U0.30 U2.13 | length 50.8
  Component Side w0.254: U2.13 34.004,65.227 35.001,64.23 35.001,57.683 39.573,53.111 39.573,50.038 42.147,47.464 65.024,47.464 65.553,47.993 U0.30
PA2: U0.31 U2.12 | length 45.6
  Component Side w0.254: U2.12 36.004,61.888 37.008,60.884 37.008,57.683 42.088,52.603 42.088,48.514 42.307,48.295 62.28,48.295 63.053,49.068 U0.31
PA3: U0.32 U2.11 | length 38.7
  Component Side w0.254: U2.11 38.004,64.973 40.996,61.982 40.996,56.845 43.51,54.331 48.26,54.331 49.115,53.476 49.115,50.479 50.816,48.778 59.14,48.778 60.553,50.19 U0.32
PA4: U0.33 U3.10 | length 21
  Component Side w0.254: U0.33 58.053,54.356 58.561,54.864 62.738,54.864 64.186,56.312 64.186,63.246 63.652,63.78 63.652,66.647 63.182,66.647 U3.10
PA5: U0.34 U3.13 | length 16
  Component Side w0.254: U0.34 55.553,52.603 56.185,53.235 56.185,61.265 57.182,62.262 U3.13
PA6: U0.35 U3.12 | length 23.2
  Component Side w0.254: U0.35 53.053,50.681 53.508,50.226 56.728,50.226 56.921,56.286 58.191,57.556 58.191,62.128 59.182,63.119 U3.12
PA7: U0.36 U3.11 | length 24.3
  Component Side w0.254: U0.36 50.553,57.321 50.19,57.683 50.19,62.179 v1(53.188,65.176)
  Solder Side w0.254: v1(53.188,65.176) 60.452,65.176 61.182,65.906 U3.11
PA8: U0.5 U4.10 | length 72.7
  Solder Side w0.254: U0.5 40.553,42.545 47.995,49.987 71.12,49.987 71.907,50.775 71.907,54.381 72.644,55.118 72.644,61.112 73.152,61.62 81.432,61.62 83.287,63.475 83.287,68.402 83.82,68.936 85.94,68.936 86.296,68.58 U4.10
PA9: U0.6 U4.13 | length 67.7
  Component Side w0.254: U0.6 43.053,43.688 43.561,44.196 71.476,44.196 71.984,44.704 71.984,58.141 73.228,59.385 v1(73.228,63.602)
  Solder Side w0.254: v1(73.228,63.602) 80.562,63.602 81.28,64.319 81.28,64.929 80.296,65.913 U4.13
PA10: U0.7 U4.12 | length 85.1
  Component Side w0.254: U0.7 45.553,37.908 45.974,38.329 61.062,38.329 61.798,37.592 61.798,35.509 62.484,34.823 73.787,34.823 74.524,35.56 74.524,48.463 74.739,48.678 87.376,48.678 87.63,48.932 87.63,50.698 81.305,57.023 81.305,60.935 78.842,63.398 78.842,65.5 78.994,65.652 82.112,65.652 82.296,65.837 U4.12
PA11: U0.8 U4.11 | length 77.5
  Solder Side w0.254: U0.8 48.053,40.462 56.435,48.844 73.127,48.844 74.016,49.733 74.016,54.381 73.304,55.093 73.304,60.935 78.74,60.935 79.299,60.376 79.299,58.141 79.756,57.683 88.9,57.683 89.287,58.07 89.287,64.008 88.423,64.872 84.836,64.872 84.296,65.412 U4.11
PA12: U0.9 U5.10 | length 82.3
  Component Side w0.254: U0.9 50.553,32.004 51.188,31.369 100.914,31.369 102.286,32.741 102.286,53.848 104.287,55.849 U5.10
PA13: U0.23 U5.13 | length 34.5
  Solder Side w0.254: U0.23 83.053,52.172 102.997,52.172 103.327,52.502 103.327,58.039 104.14,58.852 106.705,58.852 107.29,59.436 107.29,61.493 106.934,61.849 U5.13
PA14: U0.24 U5.12 | length 33.6
  Solder Side w0.254: U0.24 80.553,53.34 81.163,53.95 90.348,53.95 91.592,52.705 101.295,52.705 101.93,53.34 101.93,59.163 102.616,59.849 U5.12
PA15: U0.10 U5.11 | length 66.1
  Solder Side w0.254: U0.10 53.053,38.608 53.561,39.116 73.076,39.116 85.217,51.257 103.454,51.257 104.013,51.816 104.013,57.519 104.343,57.849 U5.11
pads on no net: H0.0 H0.12 H1.0 H1.12 M2.0 M2.12 M3.0 M3.12 U0.1 U0.2 U0.3 U0.4 U0.11 U0.12 U0.13 U0.14 U0.15 U0.16 U0.17 U0.20 U0.21 U0.22 U0.25 U0.26 U0.27 U0.28 U0.37 U0.38 U0.39 U0.40 U0.41 U0.42 U0.43 U0.44 U1.3

## Polygon pours and split planes (outlines as drawn)
170VGND on Ground Plane (split plane): 124.585,25.91 25.91,25.91 25.91,117.6 124.585,117.6
170V on Power Plane (split plane): 124.585,25.91 25.91,25.91 25.91,117.6 124.585,117.6

## Keep-outs
Keep-Out Layer:
  the board outline again, w0.254

## Silkscreen, mask and mechanical layers (free items; w line width, h text height)
Top Overlay:
  circle w0.254: c102.87,34.29 r3.703
  lines w0.254: 100.33,34.29 101.6,34.29 ; 100.965,33.655 100.965,34.925 ; 104.14,34.29 105.41,34.29 ; 118.11,77.597 120.65,77.597 ; 118.11,80.137 118.11,80.772 120.65,80.772 120.65,80.137 ; 119.38,76.327 119.38,78.867 ; 116.84,55.372 121.92,55.372 121.92,80.137 116.84,80.137 116.84,55.372
  text "99.69mm x 92.71mm x 1.60mm / Nixie Clock / https://github.com/iPlanC/nixie_clock/" at 29.21,38.534 h1.52

## Dimensions
25.4,118.11 to 25.4,25.4 on Bottom Overlay
25.4,25.4 to 125.095,25.4 on Bottom Overlay

## Text inside footprints (layer, text, board x,y; h text height)
BT0: Top Overlay "+" at 98.565,45.016 h1.15